# Altium PCB PCB1_with_m2.PcbDoc
Units mm, origin at the board's own origin, x right, y up, seen from the top; angles counter-clockwise.
Board outline 39.8 x 37.8 mm, 4 copper layers (Top Layer, Int1 (GND), Int2 (PWR), Bottom Layer), stack 1.586 mm thick; 4 components, 0 nets, 84 pads, 0 vias.
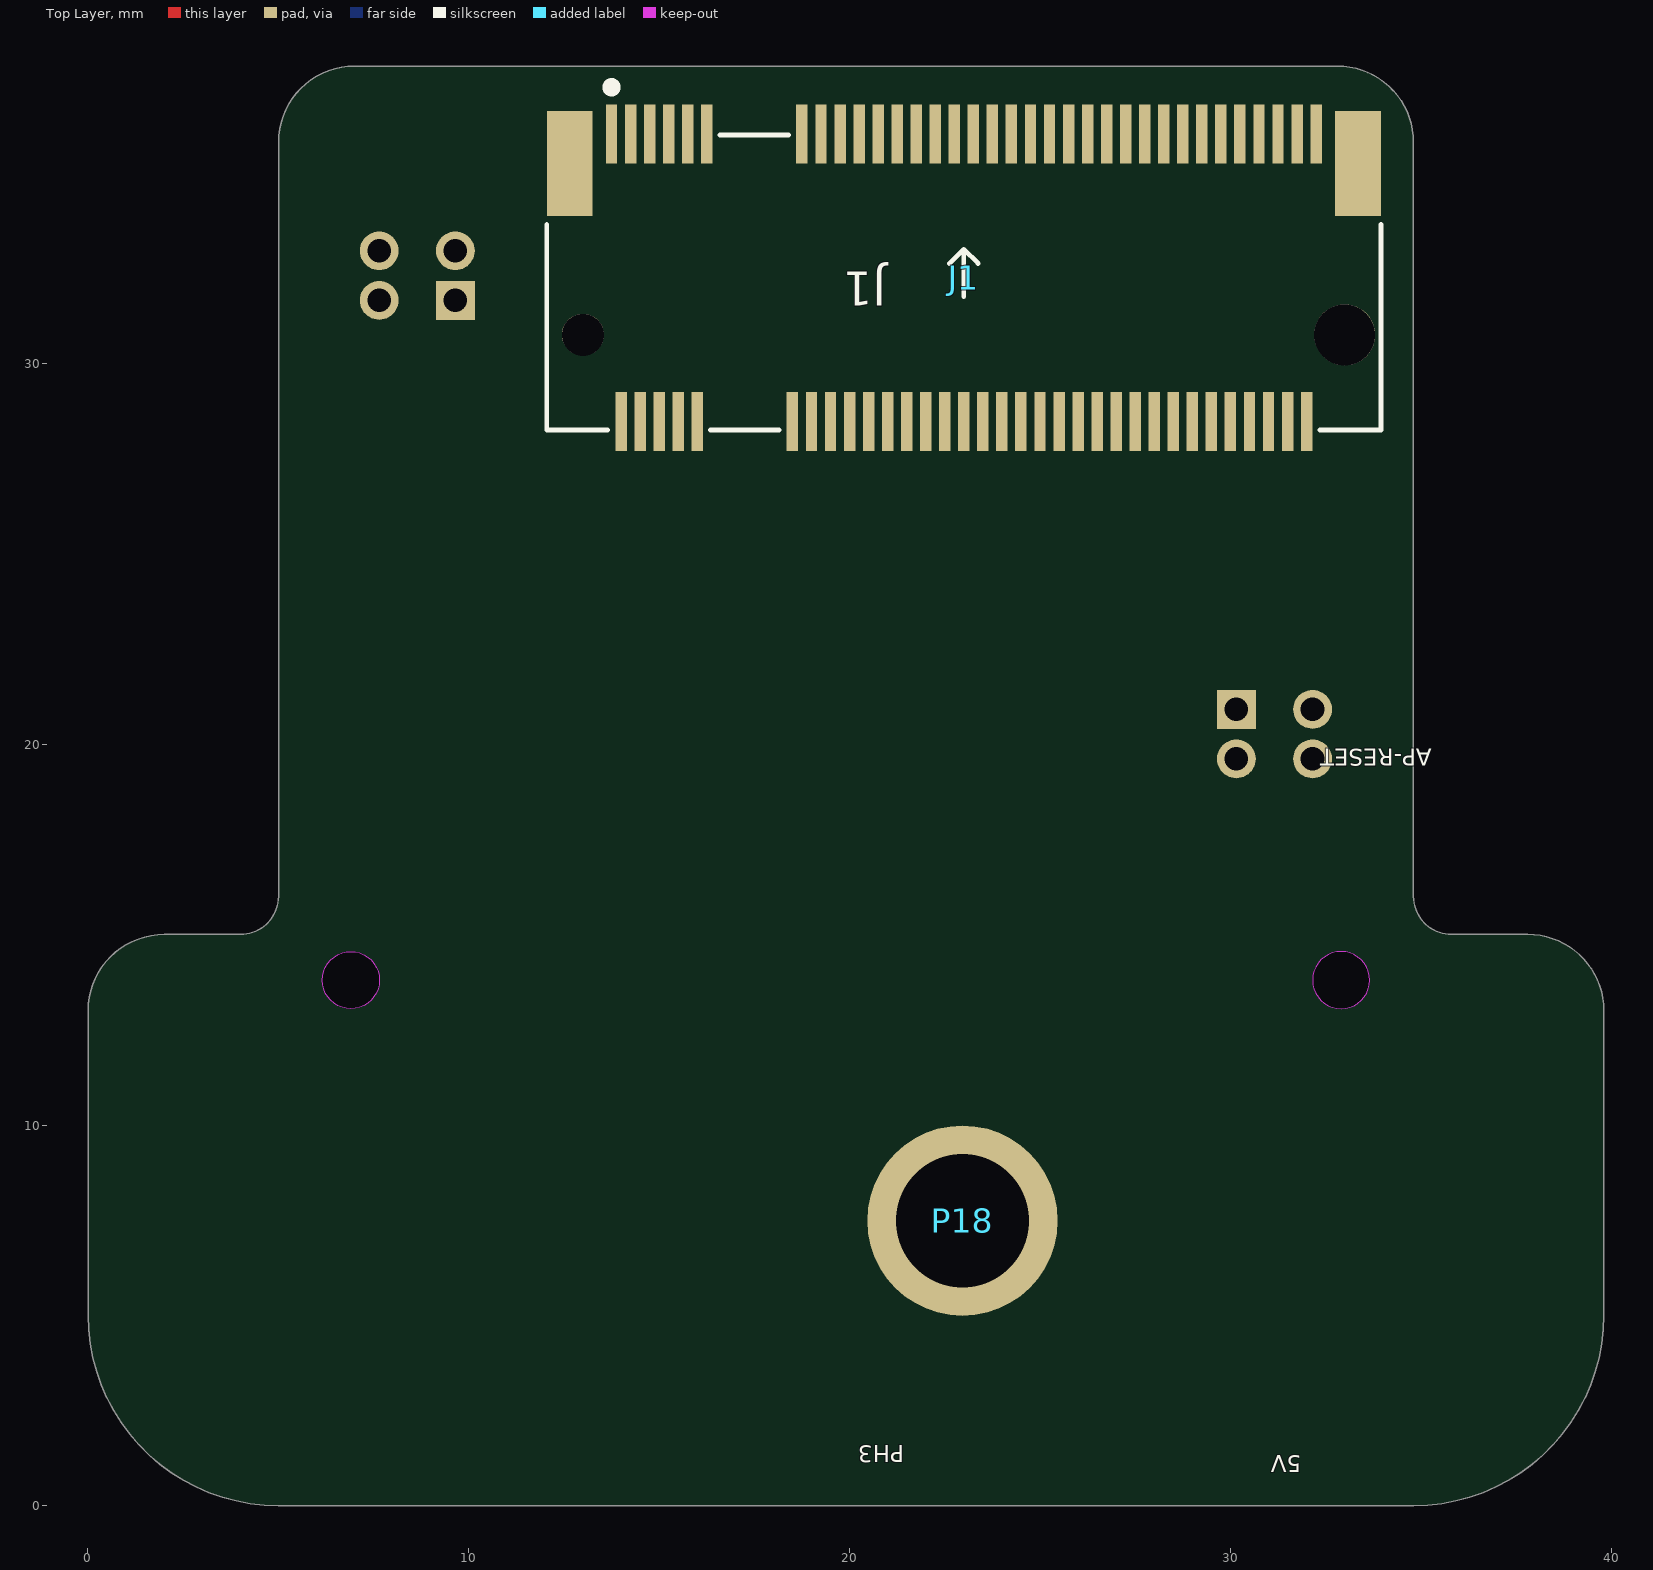
[diagram p0: Top Layer view]
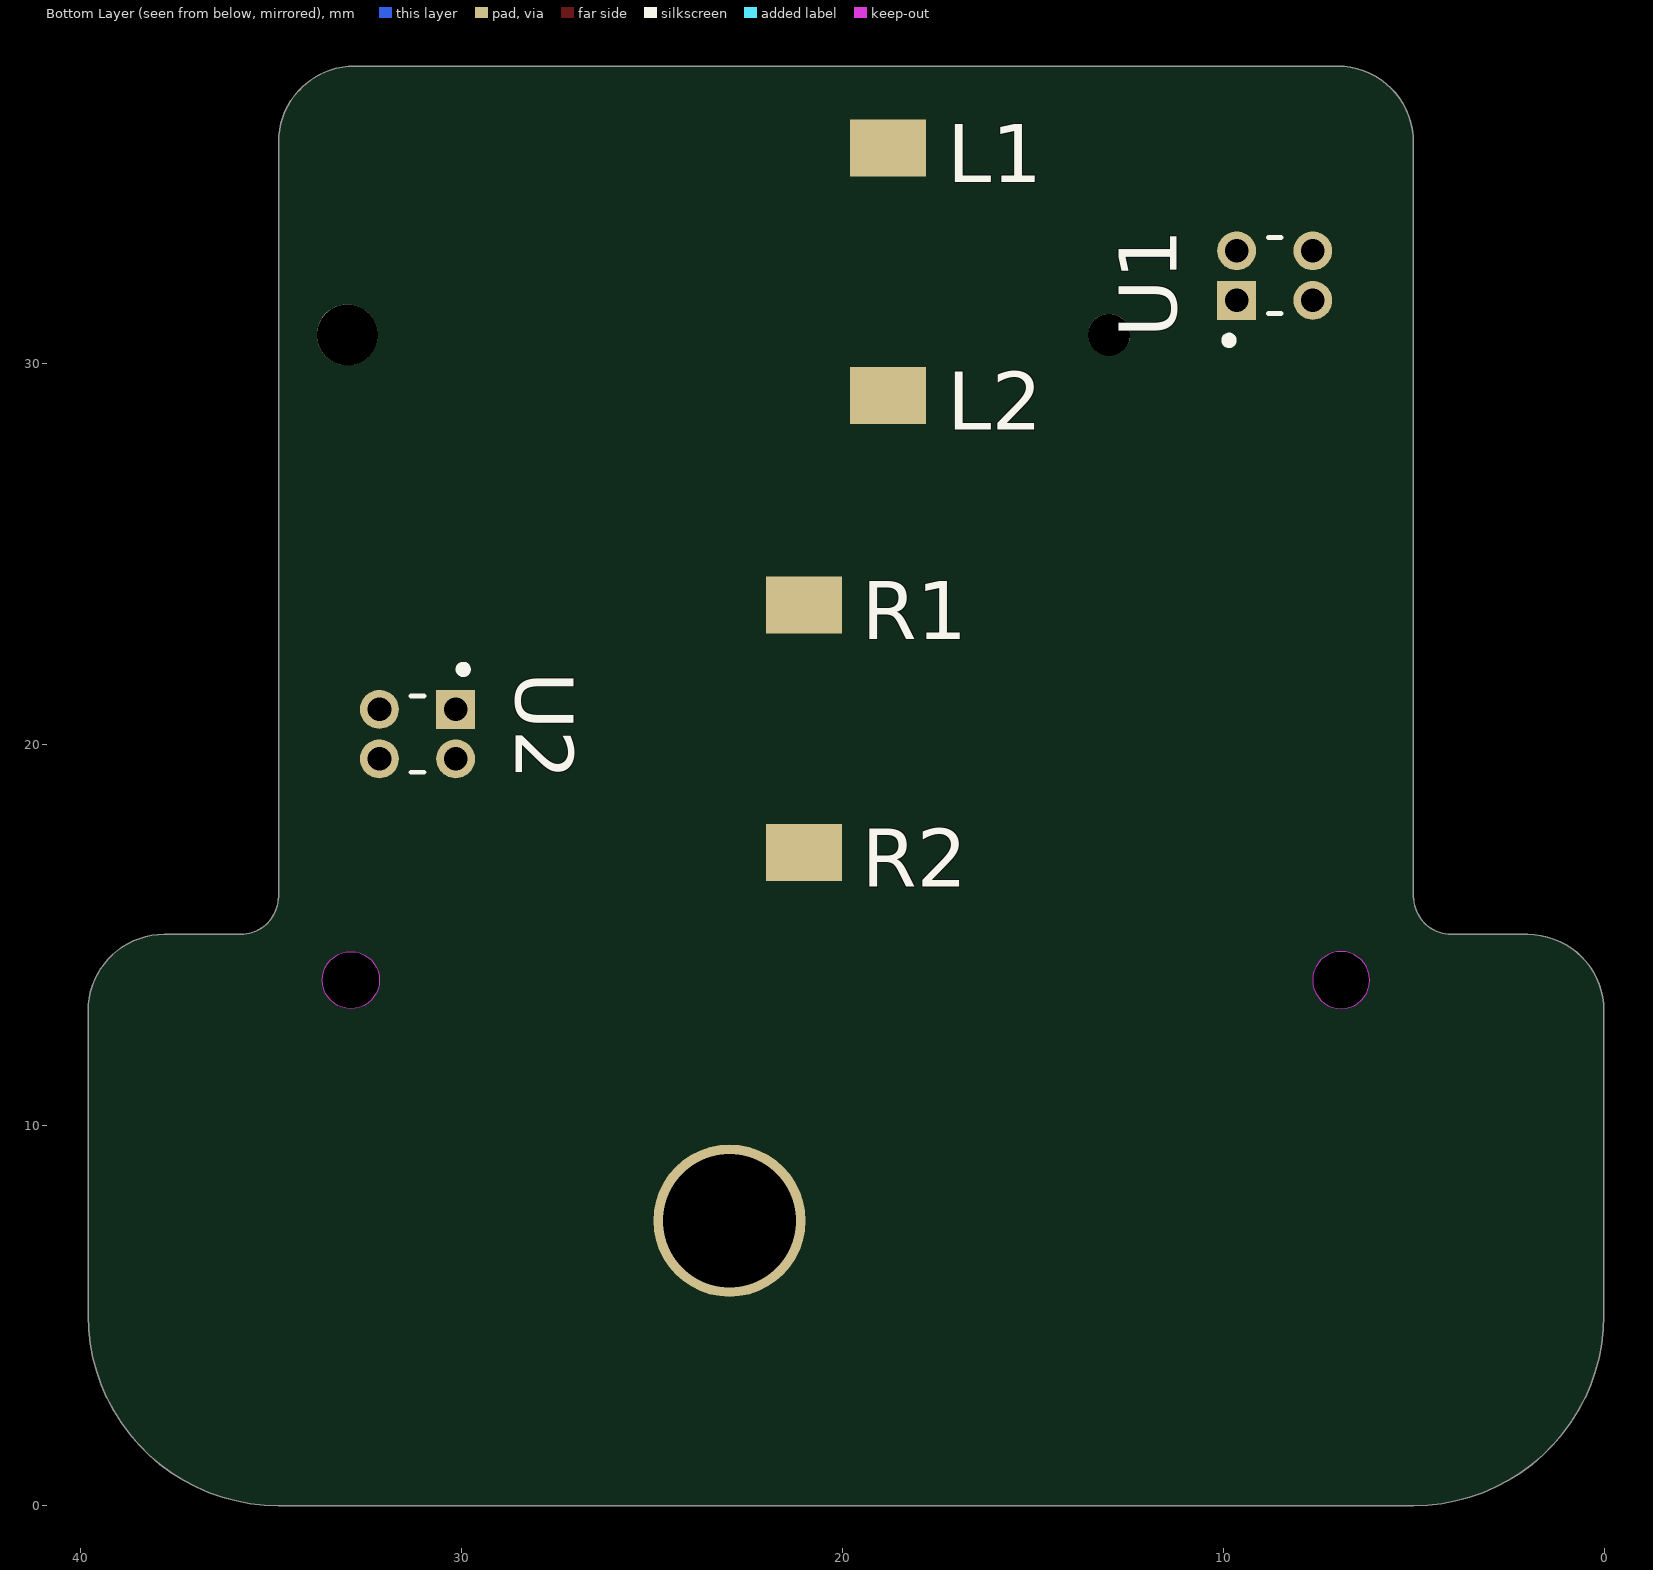
[diagram p1: Bottom Layer view, seen from below]

## Layer stack, top to bottom
Top Solder: solder mask 0.0152, SM-001, Dk 3.8
Top Layer: signal copper 0.035
Dielectric 1: prepreg 0.2104, PP-017, Dk 4.5
Int1 (GND): signal copper 0.0152
Dielectric 2: core 1.065, Core-039, Dk 4.48
Int2 (PWR): signal copper 0.0152
Dielectric 3: prepreg 0.2104, PP-017, Dk 4.5
Bottom Layer: signal copper 0.035
Bottom Solder: solder mask 0.0152, SM-001, Dk 3.8

## Board outline
0.006,5.006 0.006,13.006 cw(c2.006,13.006) 2.006,15.006 4.006,15.006 ccw(c4.006,16.006) 5.006,16.006 5.006,35.806 cw(c7.006,35.806) 7.006,37.806 32.806,37.806 cw(c32.806,35.806) 34.806,35.806 34.806,16.006 ccw(c35.806,16.006) 35.806,15.006 37.806,15.006 cw(c37.806,13.006) 39.806,13.006 39.806,5.006 cw(c34.806,5.006) 34.806,0.006 5.006,0.006 cw(c5.006,5.006)
cut-out: 32.156,13.806 ccw(c32.906,13.806) 32.906,13.056 ccw(c32.906,13.806) 33.656,13.806 ccw(c32.906,13.806) 32.906,14.556 ccw(c32.906,13.806)
cut-out: 6.906,13.056 cw(c6.906,13.806) 6.156,13.806 cw(c6.906,13.806) 6.906,14.556 cw(c6.906,13.806) 7.656,13.806 cw(c6.906,13.806)

## Design rules (kind name [scope] priority, off if disabled: settings)
BoardOutlineClearance [All] p1: gap=0.2 ignorepadtopadclearanceinfootprint=FALSE except(0.4: Arc-SplitBarrior Arc-SplitContinuation Track-SplitBarrior Track-SplitContinuation SMDPad-SplitBarrior SMDPad-SplitContinuation THPad-SplitBarrior THPad-SplitContinuation Via-SplitBarrior Via-SplitContinuation Fill-SplitBarrior Fill-SplitContinuation Poly-SplitBarrior Poly-SplitContinuation Region-SplitBarrior Region-SplitContinuation Text-SplitBarrior Text-SplitContinuation)
Clearance [All] p1: gap=0.2 ignorepadtopadclearanceinfootprint=FALSE except(0: Arc-Text Track-Text SMDPad-Text THPad-Text Via-Text Fill-Text Poly-Text Region-Text Text-Text; 0.089: Arc-Arc Arc-Track Arc-SMDPad Track-Track Track-SMDPad SMDPad-SMDPad; 0.127: Arc-Via Track-Via SMDPad-Via THPad-Via Via-Via)
HoleSize [All] p1: absolutevalues=TRUE maxlimit=6.3 minlimit=0.2 maxpercent=80.000 minpercent=20.000
MinimumAnnularRing [All] p1: minimumring=0.076
MinimumSolderMaskSliver [All] p1: minsoldermaskwidth=0.1
PlaneClearance [All] p1: clearance=0.127
PlaneConnect [All] p1: pad.planeconnectstyle=Relief pad.reliefexpansion=0.127 pad.reliefentries=4 pad.reliefconductorwidth=0.127 pad.reliefairgap=0.127 via.planeconnectstyle=Direct via.reliefexpansion=0.508 via.reliefentries=4 via.reliefconductorwidth=0.254 via.reliefairgap=0.254
PolygonConnect [All] p1: thpad.connectstyle=Relief thpad.reliefconductorwidth=0.127 thpad.reliefentries=4 thpad.polygonreliefangle="45 Angle" thpad.airgapwidth=0.127 smdpad.connectstyle=Relief smdpad.reliefconductorwidth=0.127 smdpad.reliefentries=4 smdpad.polygonreliefangle="90 Angle" smdpad.airgapwidth=0.127 via.connectstyle=Direct via.reliefconductorwidth=0.254 via.reliefentries=4 via.polygonreliefangle="90 Angle" via.airgapwidth=0.254
RoutingVias [All] p1: holewidth=0.2 width=0.3 viastyle="Through Hole" minholewidth=0.2 minwidth=0.3 maxholewidth=1 maxwidth=2
SilkToSilkClearance [All] p1: silktosilkclearance=0.15
SilkToSolderMaskClearance [IsPad] p1: minsilkscreentomaskgap=0.15 clearancetoexposedcopper=TRUE
SolderMaskExpansion [All] p1: expansion=0.102 istentingtop=FALSE
Width [All] p1: maxlimit=2.54 minlimit=0.089 preferedwidth=0.089
24 further rules are at their usual default settings.

## Classes and differential pairs
component class Sheet1: U1 U2

## Components (designator, comment, footprint, x,y, rotation, side; value= is the part's Value field where it differs from the comment)
J1 "NGFF-67P_B-KEY座子 4.2H高" M2-67P0R50_B_FEMALE 23,30.75 r0 top
P18 "M2x4.5x4.2 铜柱2.6H 贴片螺母" "M.2 SMT-FEMALE - FULL" 22.965,7.49 r180 top
U1 "GP1S196HCZ0F" OPTO_GP1S196HCZ0F 8.65,32.306 r90 bottom locked
U2 "GP1S196HCZ0F" OPTO_GP1S196HCZ0F 31.156,20.266 r270 bottom locked

## Footprints (in the part's own frame and the unit in brackets; to place one, negate y for a bottom-side part, rotate by r counter-clockwise, add the part's x,y. Pads: shape width x height; smd on the part's side, far side on the other; paste and mask are expansions set on the pad)
M2-67P0R50_B_FEMALE [mm] "M2-67P0R50_B"
  rect 0.3x1.55 smd mask+0.051: 1(-9.25,5.275) 2(-9,-2.275) 3(-8.75,5.275) 4(-8.5,-2.275) 5(-8.25,5.275) 6(-8,-2.275) 7(-7.75,5.275) 8(-7.5,-2.275) 9(-7.25,5.275) 10(-7,-2.275) 11(-6.75,5.275) 20(-4.5,-2.275) 21(-4.25,5.275) 22(-4,-2.275) 23(-3.75,5.275) 24(-3.5,-2.275) 25(-3.25,5.275) 26(-3,-2.275) 27(-2.75,5.275) 28(-2.5,-2.275) 29(-2.25,5.275) 30(-2,-2.275) 31(-1.75,5.275) 32(-1.5,-2.275) 33(-1.25,5.275) 34(-1,-2.275) 35(-0.75,5.275) 36(-0.5,-2.275) 37(-0.25,5.275) 38(0,-2.275) 39(0.25,5.275) 40(0.5,-2.275) 41(0.75,5.275) 42(1,-2.275) 43(1.25,5.275) 44(1.5,-2.275) 45(1.75,5.275) 46(2,-2.275) 47(2.25,5.275) 48(2.5,-2.275) 49(2.75,5.275) 50(3,-2.275) 51(3.25,5.275) 52(3.5,-2.275) 53(3.75,5.275) 54(4,-2.275) 55(4.25,5.275) 56(4.5,-2.275) 57(4.75,5.275) 58(5,-2.275) 59(5.25,5.275) 60(5.5,-2.275) 61(5.75,5.275) 62(6,-2.275) 63(6.25,5.275) 64(6.5,-2.275) 65(6.75,5.275) 66(7,-2.275) 67(7.25,5.275) 68(7.5,-2.275) 69(7.75,5.275) 70(8,-2.275) 71(8.25,5.275) 72(8.5,-2.275) 73(8.75,5.275) 74(9,-2.275) 75(9.25,5.275)
  round 1.1 hole 1.1 mask+0.051: " "(-10,0)
  round 1.6 / inner round 1.524 / far side round 1.6 hole 1.6 mask+0.051: " "(10,0)
  rect 1.2x2.75 smd mask+0.051: SH1(-10.35,4.5) SH2(10.35,4.5)
  silkscreen extent -10.95,-2.5 10.95,6.62, body extent -10.95,-2.85 10.95,5.85, height 4.09
"M.2 SMT-FEMALE - FULL" [mm]
  round 5 / inner round 4 / far side round 4 hole 3.5 paste+0 mask+0.051: 1(0,0)
  body extent -2.26,-2.24 2.24,2.26, height 2.46
OPTO_GP1S196HCZ0F [mm]
  rect 1.02x1.02 hole 0.62: 1(-0.65,1)
  round 1.02 hole 0.62: 2(-0.65,-1) 3(0.65,-1) 4(0.65,1)
  silkscreen extent -1.8,-0.17 1,1.3, body extent -1,-1.55 1,1.55, height 2.7

## Part data
J1: library part NGFF-67P_B-MALE
P18: library part HEADER-1X1
U1 U2: "Optical Sensor Through-Beam 0.043 (1.1mm) Phototransistor PCB Mount", Package="PCB Mount Sharp", Availability=Warning, Check_prices=https://www.snapeda.com/parts/GP1S196HCZ0F/Sharp%20Microelectronics/view-part/2699849/?ref=eda, MF="Sharp Microelectronics", MP=GP1S196HCZ0F, Price=None, Purchase-URL=https://pricing.snapeda.com/search/part/GP1S196HCZ0F/?ref=eda, SnapEDA_Link=https://www.snapeda.com/parts/GP1S196HCZ0F/Sharp%20Microelectronics/view-part/2699849/?ref=snap

## Free pads (board coordinates)
  rect 2x1.5 smd far side: 1(18.806,35.656) 2(18.806,29.156) 3(21.006,23.656) 4(21.006,17.156)

## Nets (pads, with @x,y where several pads share a name; then routed paths per layer and width w, separated by ;. In a path a pad name is that pad's centre, name@x,y a point inside that pad or via, vN(x,y) a via of type N, cw(c..) or ccw(c..) an arc to the next point about the centre after c; other vN are vias at no path point)
pads on no net: "J1. " J1.1 J1.2 J1.3 J1.4 J1.5 J1.6 J1.7 J1.8 J1.9 J1.10 J1.11 J1.20 J1.21 J1.22 J1.23 J1.24 J1.25 J1.26 J1.27 J1.28 J1.29 J1.30 J1.31 J1.32 J1.33 J1.34 J1.35 J1.36 J1.37 J1.38 J1.39 J1.40 J1.41 J1.42 J1.43 J1.44 J1.45 J1.46 J1.47 J1.48 J1.49 J1.50 J1.51 J1.52 J1.53 J1.54 J1.55 J1.56 J1.57 J1.58 J1.59 J1.60 J1.61 J1.62 J1.63 J1.64 J1.65 J1.66 J1.67 J1.68 J1.69 J1.70 J1.71 J1.72 J1.73 J1.74 J1.75 J1.SH1 J1.SH2 P18.1 U1.1 U1.2 U1.3 U1.4 U2.1 U2.2 U2.3 U2.4

## Silkscreen, mask and mechanical layers (free items; w line width, h text height)
Top Overlay:
  text "AP-RESET" at 35.283,20.034 h0.76 r180
  text "PH3" at 21.44,1.746 h0.76 r180
  text "5V" at 31.854,1.492 h0.76 r180
Bottom Overlay:
  text "L1" at 17.246,34.754 h1.52
  text "L2" at 17.246,28.254 h1.52
  text "R1" at 19.496,22.754 h1.52
  text "R2" at 19.496,16.254 h1.52
Mechanical 1:
  circle w0.013: c6.906,13.806 r0.75
  circle w0.013: c32.906,13.806 r0.75
  lines w0.013: 0.006,5.006 ccw(c5.006,5.006) 5.006,0.006 34.806,0.006 ccw(c34.806,5.006) 39.806,5.006 39.806,13.006 ccw(c37.806,13.006) 37.806,15.006 35.806,15.006 cw(c35.806,16.006) 34.806,16.006 34.806,35.806 ccw(c32.806,35.806) 32.806,37.806 7.006,37.806 ccw(c7.006,35.806) 5.006,35.806 5.006,16.006 cw(c4.006,16.006) 4.006,15.006 2.006,15.006 ccw(c2.006,13.006) 0.006,13.006 0.006,5.006

## Text inside footprints (layer, text, board x,y; h text height)
J1: Mechanical 9 "NGFF-67P_B" at 22,31.5 h0.51; Mechanical 8 "11" at 16.48,36.838 h0.51; Mechanical 8 "9" at 15.98,36.431 h0.51; Mechanical 8 "31" at 21.98,36.838 h0.51; Mechanical 8 "51" at 26.98,36.838 h0.51; Mechanical 8 "39" at 23.98,36.838 h0.51; Mechanical 8 "37" at 23.48,36.838 h0.51; Mechanical 8 "30" at 21.73,29.288 h0.51; Mechanical 8 "10" at 16.23,29.288 h0.51; Mechanical 8 "SH1" at 13.38,36.469 h0.51; Mechanical 8 "6" at 15.23,28.881 h0.51; Mechanical 8 "8" at 15.73,28.881 h0.51; Mechanical 8 "7" at 15.48,36.431 h0.51; Mechanical 8 "5" at 14.98,36.431 h0.51; Mechanical 8 "SH2" at 34.08,36.469 h0.51; Mechanical 8 "49" at 26.48,36.838 h0.51; Mechanical 8 "33" at 22.48,36.838 h0.51; Mechanical 8 "35" at 22.98,36.838 h0.51; Mechanical 8 "42" at 24.73,29.288 h0.51; Mechanical 8 "29" at 21.48,36.838 h0.51; Mechanical 8 "47" at 25.98,36.838 h0.51; Mechanical 8 "45" at 25.48,36.838 h0.51; Mechanical 8 "43" at 24.98,36.838 h0.51; Mechanical 8 "41" at 24.48,36.838 h0.51; Mechanical 8 "67" at 30.98,36.838 h0.51; Mechanical 8 "65" at 30.48,36.838 h0.51; Mechanical 8 "61" at 29.48,36.838 h0.51; Mechanical 8 "63" at 29.98,36.838 h0.51; Mechanical 8 "57" at 28.48,36.838 h0.51; Mechanical 8 "59" at 28.98,36.838 h0.51; Mechanical 8 "55" at 27.98,36.838 h0.51; Mechanical 8 "53" at 27.48,36.838 h0.51; Mechanical 8 "68" at 31.23,29.288 h0.51; Mechanical 8 "52" at 27.23,29.288 h0.51; Mechanical 8 "64" at 30.23,29.288 h0.51; Mechanical 8 "66" at 30.73,29.288 h0.51; Mechanical 8 "60" at 29.23,29.288 h0.51; Mechanical 8 "62" at 29.73,29.288 h0.51; Mechanical 8 "50" at 26.73,29.288 h0.51; Mechanical 8 "48" at 26.23,29.288 h0.51; Mechanical 8 "54" at 27.73,29.288 h0.51; Mechanical 8 "70" at 31.73,29.288 h0.51; Mechanical 8 "58" at 28.73,29.288 h0.51; Mechanical 8 "56" at 28.23,29.288 h0.51; Mechanical 8 "71" at 31.98,36.838 h0.51; Mechanical 8 "69" at 31.48,36.838 h0.51; Mechanical 8 "2" at 14.23,28.881 h0.51; Mechanical 8 "3" at 14.48,36.431 h0.51; Mechanical 8 "1" at 13.98,36.431 h0.51; Mechanical 8 "4" at 14.73,28.881 h0.51; Mechanical 8 "73" at 32.48,36.838 h0.51; Mechanical 8 "75" at 32.98,36.838 h0.51; Mechanical 8 "32" at 22.23,29.288 h0.51; Mechanical 8 "34" at 22.73,29.288 h0.51; Mechanical 8 "72" at 32.23,29.288 h0.51; Mechanical 8 "74" at 32.73,29.288 h0.51; Mechanical 8 "46" at 25.73,29.288 h0.51; Mechanical 8 "24" at 20.23,29.288 h0.51; Mechanical 8 "26" at 20.73,29.288 h0.51; Mechanical 8 "44" at 25.23,29.288 h0.51; Mechanical 8 "27" at 20.98,36.838 h0.51; Mechanical 8 "25" at 20.48,36.838 h0.51; Mechanical 8 "23" at 19.98,36.838 h0.51; Mechanical 8 "21" at 19.48,36.838 h0.51; Mechanical 8 "40" at 24.23,29.288 h0.51; Mechanical 8 "20" at 19.23,29.288 h0.51; Mechanical 8 "22" at 19.73,29.288 h0.51; Mechanical 8 "28" at 21.23,29.288 h0.51; Mechanical 8 "36" at 23.23,29.288 h0.51; Mechanical 8 "38" at 23.73,29.288 h0.51